# EAGLE board Osborne PSU PCB v7 (EAGLE 9.7.0)
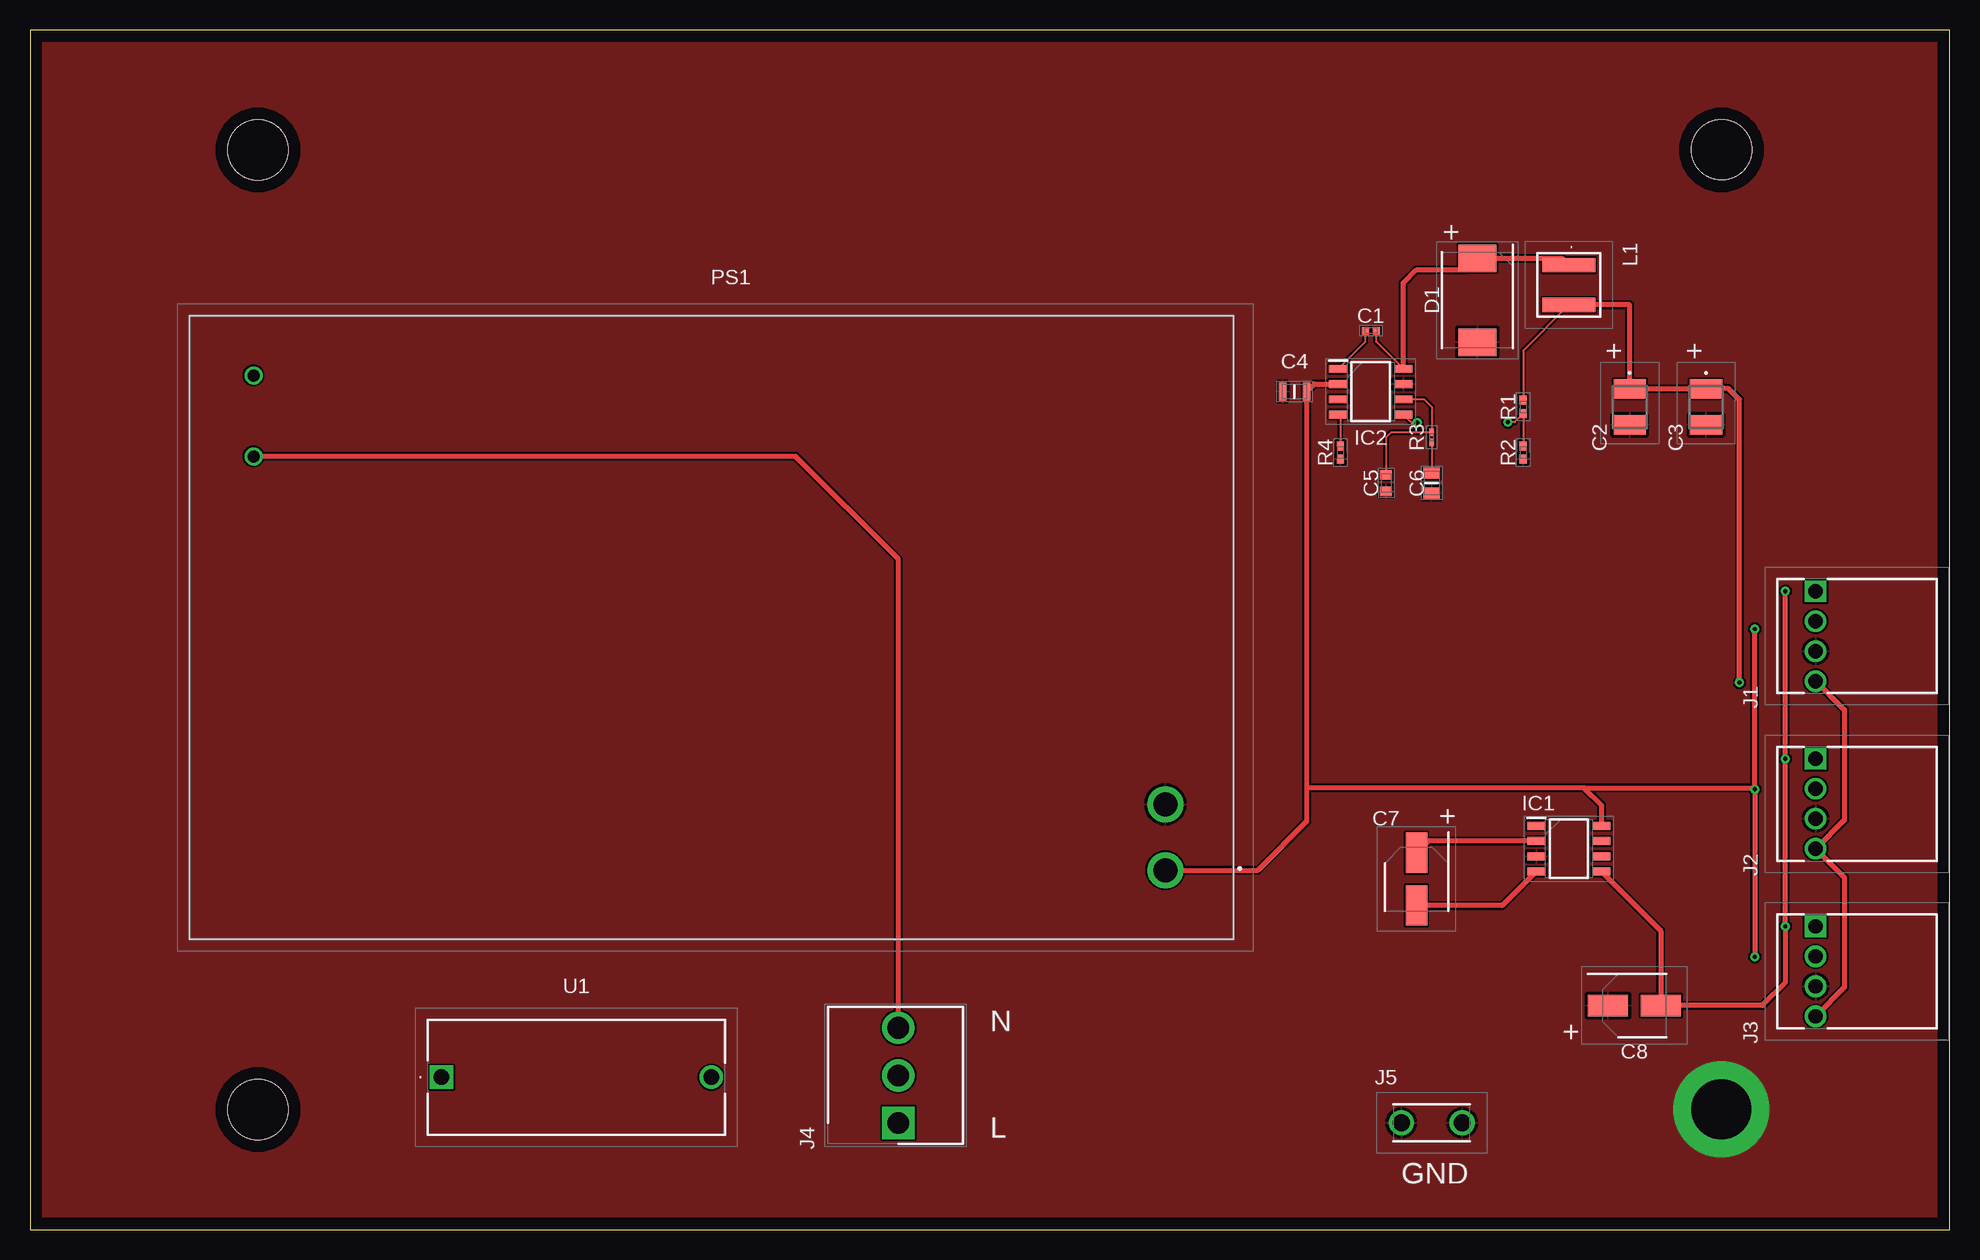
[diagram p0: board, top side]
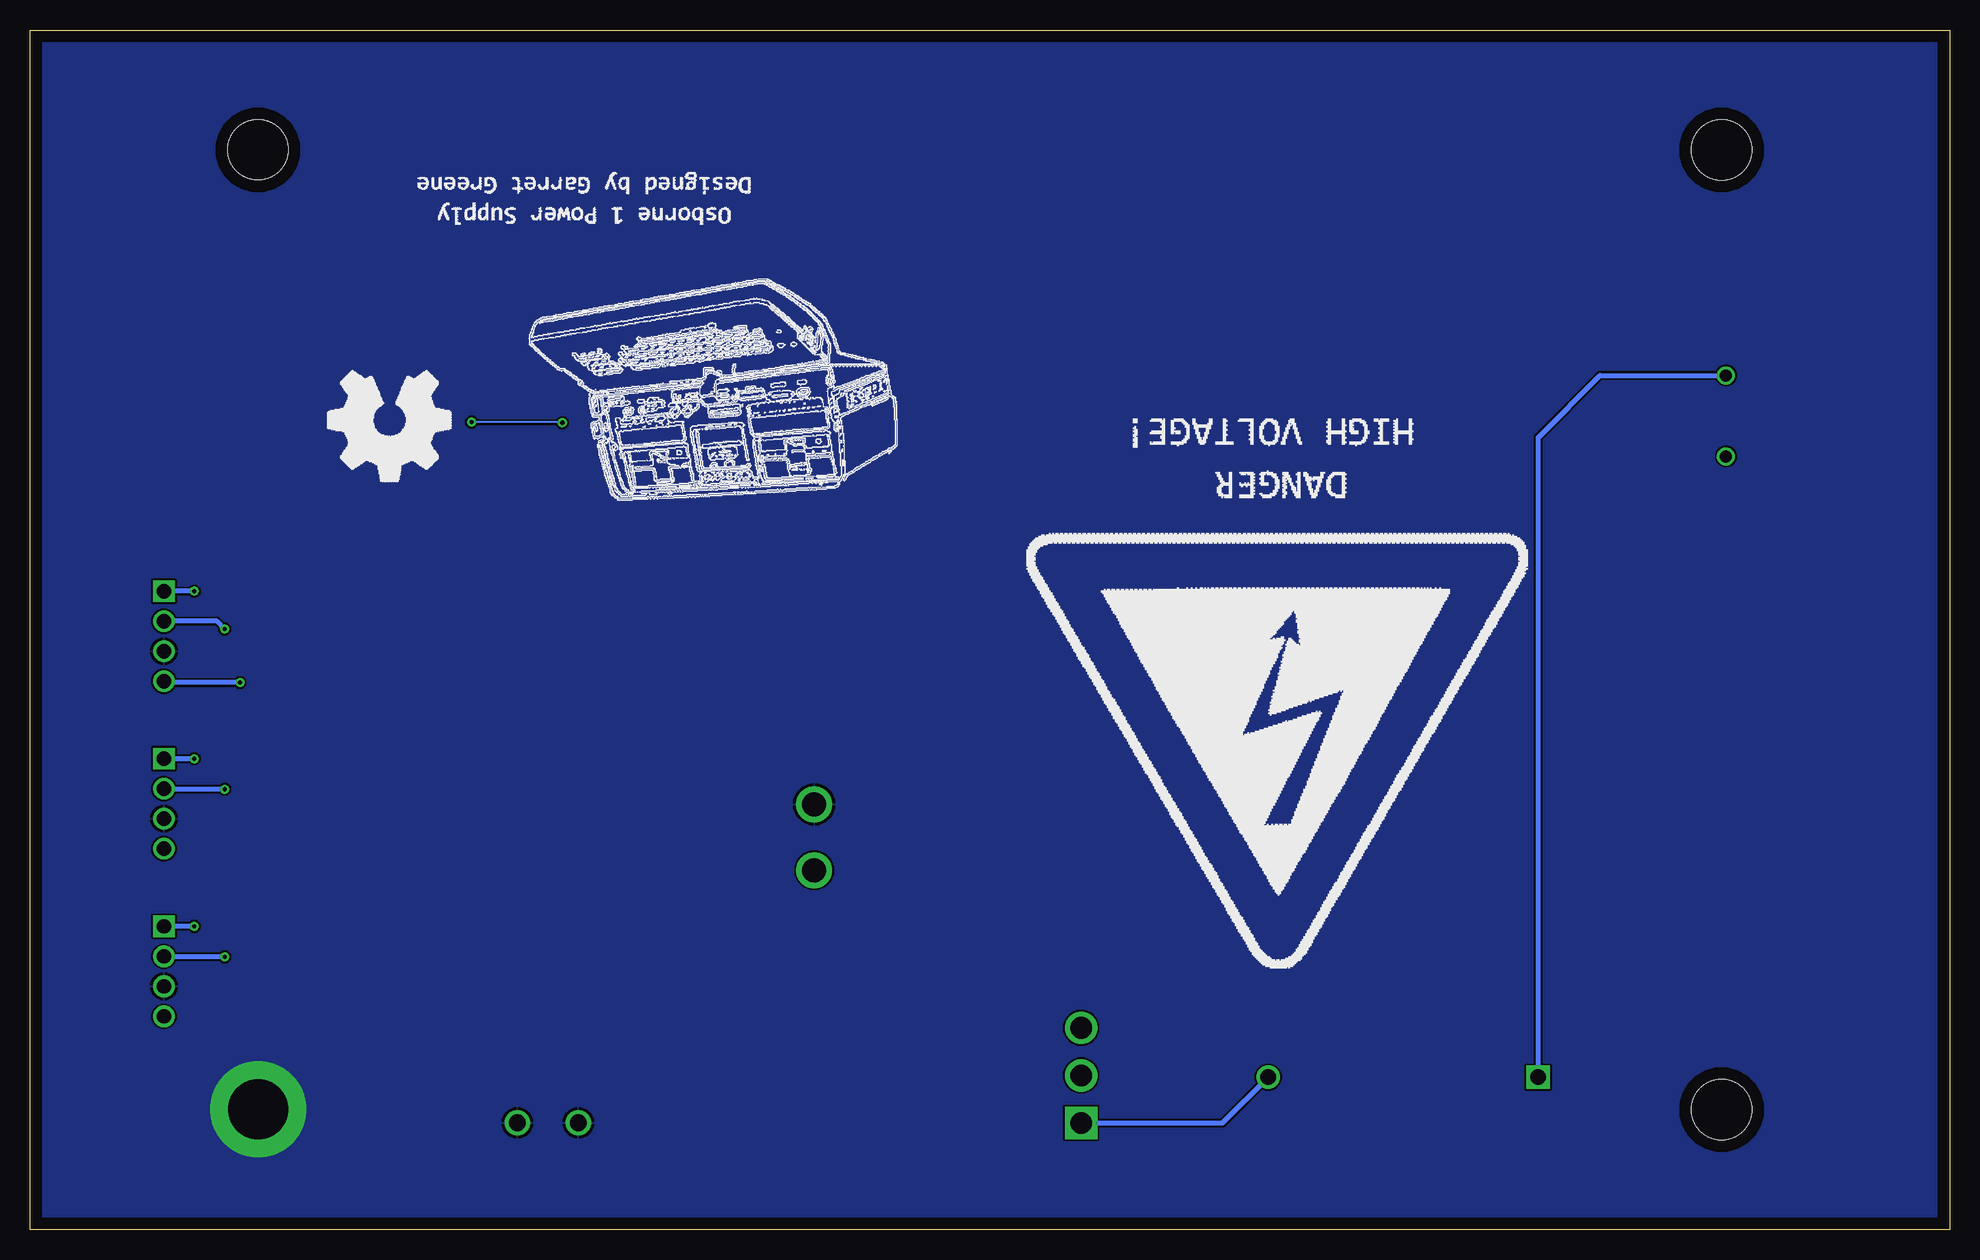
[diagram p1: board, bottom side, seen from below]

Size 160 x 100 mm. Coordinates in mm from the lower left corner, seen from the top.
Outline: 0,100 0,0 160,0 160,100 0,100
Copper layers (1*16): Top / Bottom
Stack-up Default Layer Stack: Top User Defined 0.035mm / Dielectric-1 User Defined 1.5mm / Bottom User Defined 0.035mm
Design rules: minimum copper width 6mil, minimum drill size 0.35mm, copper clearance wire_polygon to wire_polygon 6mil, copper clearance wire_polygon to pad_smd 6mil, copper clearance wire_polygon to via 6mil, copper clearance pad_smd to pad_smd 6mil, copper clearance pad_smd to via 6mil, copper clearance via to via 6mil, copper clearance smd to pad (same net) 6mil, copper clearance smd to via (same net) 6mil, copper clearance smd to smd (same net) 6mil, dimension clearance 40mil, via restrict clearance 0mil, restrict clearance 0mil, drill distance 6mil, keepout clearance 0mil
Holes 5 mm at 19,90 19,10 141,90.01

## Footprints (pad centres in the part's own frame; a part is rotated, then mirrored left to right if it is on the bottom)
CAPC1005X55N = smd 0.6 x 0.62: 1 -0.46,0; 2 0.46,0
POSCAP_B1_B1S_B1G_B15G_B2_B2S = smd 1.6 x 2.7: 1 -1.5,0; 2 1.5,0
CAPC2012X145N = smd 0.62 x 1.47: 1 -1,0; 2 1,0
CAPC1608X90N = smd 0.78 x 0.99: 1 -0.7,0; 2 0.7,0
CAPC2012X135N = smd 0.91 x 1.39: 1 -0.82,0; 2 0.82,0
CAPAE530X580N = smd 3.35 x 1.8: 1 -2.2,0; 2 2.2,0
DIOM8059X290N = smd 2.3 x 3.15: 1 -3.5,0; 2 3.5,0
SOIC127P600X175-8N = smd 1.525 x 0.65: 1 -2.712,1.905; 2 -2.712,0.635; 3 -2.712,-0.635; 4 -2.712,-1.905; 5 2.712,-1.905; 6 2.712,-0.635; 7 2.712,0.635; 8 2.712,1.905
SOIC127P600X170-8N = smd 1.525 x 0.65: 1 -2.712,1.905; 2 -2.712,0.635; 3 -2.712,-0.635; 4 -2.712,-1.905; 5 2.712,-1.905; 6 2.712,-0.635; 7 2.712,0.635; 8 2.712,1.905
22051042 = drill 1.2 pad 1.8 square: 1 0,0 | drill 1.2 pad 1.8: 2 2.5,0; 3 5,0; 4 7.5,0
SHDR3W160P0X396_1X3_1112X1062X = drill 1.8 pad 2.7 square: 1 0,0 | drill 1.8 pad 2.7: 2 -3.96,0; 3 -7.92,0
12171671 = drill 1.4 pad 2.1: 1 0,0; 2 5.08,0
XAL5030222MEC = smd 1.18 x 4.4: 1 -1.655,0; 2 1.655,0
IRM6048 = drill 2 pad 3: 1 5.7,46.25; 2 5.7,40.75 | drill 1 pad 1.5: 3 81.7,5; 4 81.7,11.75
RESC1005X40N = smd 0.75 x 0.6: 1 -0.55,0; 2 0.55,0
RESC0603X26N = smd 0.625 x 0.4: 1 -0.412,0; 2 0.412,0
696103201002 = drill 1.3 pad 1.95 square: 1 0,0 | drill 1.3 pad 1.95: 2 22.5,0

## Placement (x,y rotation side)
C1  GRM155R71A104KA01D  [CAPC1005X55N]  111.76,74.93 0 top
C2  10TPE47MAZB  [POSCAP_B1_B1S_B1G_B15G_B2_B2S]  133.35,68.58 270 top
C3  10TPE47MAZB  [POSCAP_B1_B1S_B1G_B15G_B2_B2S]  139.7,68.58 270 top
C4  C2012X5R1H475K125AB  [CAPC2012X145N]  105.41,69.85 0 top
C5  06031U6R8BAT2A  [CAPC1608X90N]  113.03,62.23 90 top
C6  CL21C222JBFNNNE  [CAPC2012X135N]  116.84,62.23 90 top
C7  875105359001  [CAPAE530X580N]  115.57,29.21 270 top
C8  875105359001  [CAPAE530X580N]  133.73,18.67 0 top
D1  CDBC540-G  [DIOM8059X290N]  120.65,77.47 270 top
IC1  ICL7662CBA+  [SOIC127P600X175-8N]  128.27,31.75 0 top
IC2  TPS54560BDDA  [SOIC127P600X170-8N]  111.76,69.85 0 top
J1  22-05-1042  [22051042]  148.84,53.21 270 top
J2  22-05-1042  [22051042]  148.84,39.24 270 top
J3  22-05-1042  [22051042]  148.84,25.27 270 top
J4  09-65-2038  [SHDR3W160P0X396_1X3_1112X1062X]  72.39,8.89 270 top
J5  1217167-1  [12171671]  114.3,8.89 0 top
L1  XAL5030-222MEC  [XAL5030222MEC]  128.27,78.74 270 top
PS1  IRM-60-12  [IRM6048]  100.33,76.2 180 top
R1  CRCW040260K4FKED  [RESC1005X40N]  124.46,68.58 270 top
R2  CRCW040211K5FKED  [RESC1005X40N]  124.46,64.77 90 top
R3  RC0201FR-0723K7L  [RESC0603X26N]  116.84,66.04 90 top
R4  CRCW040275K0FKED  [RESC1005X40N]  109.22,64.77 90 top
U1  696103201002  [696103201002]  34.29,12.7 0 top

## Library data of the parts
C1 = GRM155R71A104KA01D; DESCRIPTION: Ceramic SMT capacitor 100nF 10Vdc Murata 0402 GRM 100nF Ceramic Multilayer Capacitor, 10 V dc X7R Dielectric ??10%; HEIGHT: 0.55mm; MANUFACTURER_NAME: Murata Electronics; MANUFACTURER_PART_NUMBER: GRM155R71A104KA01D; MOUSER_PART_NUMBER: 81-GRM155R71A104KA1D; MOUSER_PRICE-STOCK: https://www.mouser.co.uk/ProductDetail/Murata-Electronics/GRM155R71A104KA01D?qs=8YPuuxuUzMIpJ%252BESZ%2Fj8CQ%3D%3D
C2 C3 = 10TPE47MAZB; DESCRIPTION: Capacitor Tantalum TPE series 10V 47uF Panasonic 47uF SMD Solid Polymer Tantalum Capacitor, 10 V dc +/-20%, POSCAP Series; HEIGHT: mm; MANUFACTURER_NAME: Panasonic; MANUFACTURER_PART_NUMBER: 10TPE47MAZB; MOUSER_PART_NUMBER: 667-10TPE47MAZB; MOUSER_PRICE-STOCK: https://www.mouser.co.uk/ProductDetail/Panasonic/10TPE47MAZB?qs=OE1iw1LrrPFA5jtx2CbXHA%3D%3D
C4 = C2012X5R1H475K125AB; DESCRIPTION: MULTILAYER CERAMIC CHIP CAPACITORS, 2012, Commercial grade, general (Up to 75V); HEIGHT: 1.45mm; MANUFACTURER_NAME: TDK; MANUFACTURER_PART_NUMBER: C2012X5R1H475K125AB; MOUSER_PART_NUMBER: 810-C2012X5R1H475K; MOUSER_PRICE-STOCK: https://www.mouser.co.uk/ProductDetail/TDK/C2012X5R1H475K125AB?qs=NRhsANhppD%252BC04rCIKmBpA%3D%3D
C5 = 06031U6R8BAT2A; DESCRIPTION: Multilayer Ceramic Capacitors MLCC - SMD/SMT 100V 6.8pF C0G 0603 0.1pF; HEIGHT: 0.9mm; MANUFACTURER_NAME: Kyocera AVX; MANUFACTURER_PART_NUMBER: 06031U6R8BAT2A; MOUSER_PART_NUMBER: 581-06031U6R8BAT2A; MOUSER_PRICE-STOCK: https://www.mouser.co.uk/ProductDetail/AVX/06031U6R8BAT2A?qs=ahudlVbFbas5u9ZWbUsx4w%3D%3D
C6 = CL21C222JBFNNNE; DESCRIPTION: Samsung Electro-Mechanics 0805 (2012M) 2.2nF MLCC 50V dc +/-5% SMD CL21C222JBFNNNE; HEIGHT: 1.35mm; MANUFACTURER_NAME: SAMSUNG; MANUFACTURER_PART_NUMBER: CL21C222JBFNNNE; MOUSER_PART_NUMBER: 187-CL21C222JBFNNNE; MOUSER_PRICE-STOCK: https://www.mouser.co.uk/ProductDetail/Samsung-Electro-Mechanics/CL21C222JBFNNNE?qs=349EhDEZ59r2o3fpAuNjEQ%3D%3D
C7 C8 = 875105359001; DESCRIPTION: WCAP-PSLP Aluminum Polymer Capacitor; HEIGHT: 5.8mm; MANUFACTURER_NAME: Wurth Elektronik; MANUFACTURER_PART_NUMBER: 875105359001; MOUSER_PART_NUMBER: 710-875105359001; MOUSER_PRICE-STOCK: https://www.mouser.co.uk/ProductDetail/Wurth-Elektronik/875105359001?qs=0KOYDY2FL299l4%2FtytGDVQ%3D%3D
D1 = CDBC540-G; DESCRIPTION: COMCHIP TECHNOLOGY CDBC540-G, SMT Schottky Diode, 40V 5A, 2-Pin DO-214AB (SMC); HEIGHT: 2.9mm; MANUFACTURER_NAME: Comchip Technology; MANUFACTURER_PART_NUMBER: CDBC540-G; MOUSER_PART_NUMBER: 750-CDBC540-G; MOUSER_PRICE-STOCK: https://www.mouser.co.uk/ProductDetail/Comchip-Technology/CDBC540-G?qs=tw%252BuQ%2FB6PO2ExpPYY64Vzw%3D%3D
IC1 = ICL7662CBA+; DESCRIPTION: ICL7662CBA+, Charge Pump Inverting, Step Up, -20 to -4.5V, 8-Pin, SOIC; HEIGHT: 1.75mm; MANUFACTURER_NAME: Analog Devices; MANUFACTURER_PART_NUMBER: ICL7662CBA+; MOUSER_PART_NUMBER: 700-ICL7662CBA; MOUSER_PRICE-STOCK: https://www.mouser.co.uk/ProductDetail/Analog-Devices-Maxim-Integrated/ICL7662CBA%2b?qs=0Y9aZN%252BMVCXxWqkDsFqq9Q%3D%3D
IC2 = TPS54560BDDA; DESCRIPTION: Switching Voltage Regulators A 595-TPS54560BDDAR; HEIGHT: 1.7mm; MANUFACTURER_NAME: Texas Instruments; MANUFACTURER_PART_NUMBER: TPS54560BDDA; MOUSER_PART_NUMBER: 595-TPS54560BDDA; MOUSER_PRICE-STOCK: https://www.mouser.co.uk/ProductDetail/Texas-Instruments/TPS54560BDDA?qs=gZXFycFWdAMqSdZZ7nACGQ%3D%3D
J1-J3 = 22-05-1042; DESCRIPTION: Headers & Wire Housings .098 HDR RA 4P 2.5mm ctrs; HEIGHT: 11.92mm; MANUFACTURER_NAME: Molex; MANUFACTURER_PART_NUMBER: 22-05-1042; MOUSER_PART_NUMBER: 538-22-05-1042; MOUSER_PRICE-STOCK: https://www.mouser.co.uk/ProductDetail/Molex/22-05-1042?qs=jsoPY5EnoNsaw4hmaEtAeg%3D%3D
J4 = 09-65-2038; DESCRIPTION: Socket; wire-board; male; KK 396,SPOX; 3.96mm; PIN:3; THT; HEIGHT: 14.25mm; MANUFACTURER_NAME: Molex; MANUFACTURER_PART_NUMBER: 09-65-2038; MOUSER_PART_NUMBER: 538-09-65-2038; MOUSER_PRICE-STOCK: https://www.mouser.co.uk/ProductDetail/Molex/09-65-2038?qs=A%252B%2FNCR0PvNU%2FSwDn3lpSlg%3D%3D
J5 = 1217167-1; DESCRIPTION: Contact Features: Mating Tab Width .25 INCH | Terminal Orientation Straight | Mating Tab Thickness .81 MM | Contact Mating Area Plating Material Thickness 3.81 MICM | PCB Terminal Type Tab | Terminal Size 6.35 | Contact Underplating Material Thickness 2.54 MICM | Contact Mating Area Plating Material Thickness 150 MICIN | Mating Tab Thickness .032 INCH | Mating Tab Width 6.35 MM | PCB Contact Termination Area Plating Material Thickness 150 MICIN | PCB Contact Termination Area Plating Material Thickness 3.81; HEIGHT: 16mm; MANUFACTURER_NAME: TE Connectivity; MANUFACTURER_PART_NUMBER: 1217167-1; MOUSER_PART_NUMBER: 571-1217167-1; MOUSER_PRICE-STOCK: https://www.mouser.co.uk/ProductDetail/TE-Connectivity-AMP/1217167-1?qs=6V028PXUNOIl5a71CGHxww%3D%3D
L1 = XAL5030-222MEC; DESCRIPTION: INDUCTOR, 2.2UH, 9.2A, 20%, PWR, 38MHZ; HEIGHT: 3.1mm; MANUFACTURER_NAME: COILCRAFT; MANUFACTURER_PART_NUMBER: XAL5030-222MEC; MOUSER_PART_NUMBER: 994-XAL5030-222MEC; MOUSER_PRICE-STOCK: https://www.mouser.co.uk/ProductDetail/Coilcraft/XAL5030-222MEC?qs=zCSbvcPd3pamMZlPWCpd5A%3D%3D
PS1 = IRM-60-12; DESCRIPTION: Mean Well 60W Encapsulated Switch Mode Power Supply, 0 5A, 12V dc; HEIGHT: 29mm; MANUFACTURER_NAME: Mean Well; MANUFACTURER_PART_NUMBER: IRM-60-12; MOUSER_PART_NUMBER: 709-IRM60-12; MOUSER_PRICE-STOCK: https://www.mouser.co.uk/ProductDetail/MEAN-WELL/IRM-60-12?qs=yID0DEbBT%252BlHwZTyc2lfhA%3D%3D
R1 = CRCW040260K4FKED; DESCRIPTION: Vishay CRCW Series Thick Film Surface Mount Resistor 0402 Case 60.4k +/-1% 0.063W +/-100ppm/C; HEIGHT: 0.4mm; MANUFACTURER_NAME: Vishay; MANUFACTURER_PART_NUMBER: CRCW040260K4FKED; MOUSER_PART_NUMBER: 71-CRCW0402-60.4K-E3; MOUSER_PRICE-STOCK: https://www.mouser.co.uk/ProductDetail/Vishay-Dale/CRCW040260K4FKED?qs=DKbL89i6OEqEiKuCH716cg%3D%3D
R2 = CRCW040211K5FKED; DESCRIPTION: Vishay CRCW Series Thick Film Surface Mount Resistor 402 Case 11.5k +/-1% 0.063W +/-100ppm/C; HEIGHT: 0.4mm; MANUFACTURER_NAME: Vishay; MANUFACTURER_PART_NUMBER: CRCW040211K5FKED; MOUSER_PART_NUMBER: 71-CRCW0402-11.5K-E3; MOUSER_PRICE-STOCK: https://www.mouser.co.uk/ProductDetail/Vishay-Dale/CRCW040211K5FKED?qs=rlE3Te1NifwrZlkreCr9ew%3D%3D
R3 = RC0201FR-0723K7L; DESCRIPTION: Res Thick Film 0201 23.7K Ohm 1% 0.05W(1/20W) +/-200ppm/C Epoxy Pad SMD T/R; HEIGHT: 0.26mm; MANUFACTURER_NAME: YAGEO; MANUFACTURER_PART_NUMBER: RC0201FR-0723K7L; MOUSER_PART_NUMBER: 603-RC0201FR-0723K7L; MOUSER_PRICE-STOCK: https://www.mouser.co.uk/ProductDetail/YAGEO/RC0201FR-0723K7L?qs=Q4gDqC5t5%2FAQco3wz1Gmbw%3D%3D
R4 = CRCW040275K0FKED; DESCRIPTION: Vishay CRCW Series Thick Film Surface Mount Resistor 0402 Case 75k +/-1% 0.063W +/-100ppm/C; HEIGHT: 0.4mm; MANUFACTURER_NAME: Vishay; MANUFACTURER_PART_NUMBER: CRCW040275K0FKED; MOUSER_PART_NUMBER: 71-CRCW0402-75K-E3; MOUSER_PRICE-STOCK: https://www.mouser.co.uk/ProductDetail/Vishay-Dale/CRCW040275K0FKED?qs=Yor07UEv01XD90tYACrZAA%3D%3D
U1 = 696103201002; DESCRIPTION: WURTH ELEKTRONIK - 696103201002 - Fuse Clip, Cartridge, 1 Pos, 5mm x 20mm, 250V, 20A, Pin; HEIGHT: 12.7mm; MANUFACTURER_NAME: Wurth Elektronik; MANUFACTURER_PART_NUMBER: 696103201002; MOUSER_PART_NUMBER: 710-696103201002; MOUSER_PRICE-STOCK: https://www.mouser.co.uk/ProductDetail/Wurth-Elektronik/696103201002?qs=%252BEew9%252B0nqrD%2Fzw00wamlEg%3D%3D

## Nets
GND: C2.2 C3.2 C4.1 C5.1 C6.1 C8.1 D1.2 IC1.3 IC2.7 J1.3 J2.3 J3.3 J5.1 J5.2 PS1.2 R2.1 R4.1
N$1: C4.2 IC1.8 IC2.2 J1.2 J2.2 J3.2 PS1.1
N$2: C2.1 C3.1 J1.4 J2.4 J3.4 L1.2 R1.1
N$3: C5.2 IC2.6 R3.2
N$4: C6.2 R3.1
N$5: C7.2 IC1.4
N$6: IC2.4 R4.2
N$7: C1.1 IC2.1
N$8: C1.2 D1.1 IC2.8 L1.1
N$9: IC2.5 R1.2 R2.2
N$10: C7.1 IC1.2
N$11: C8.2 IC1.5 J1.1 J2.1 J3.1
N$12: J4.1 U1.2
N$13: PS1.3 U1.1
N$14: J4.3 PS1.4

## Tracks (layer width: path | path; a pad name or v marks a point on that pad's centre or on a via)
GND  (via drill 5 pad 8)
  other vias: 140.97,10.01
  pour Top: 160,0 0,0 0,100 160,100
  pour Bottom: 160,0 0,0 0,100 160,100
N$1  (via drill 0.35)
  Top 0.406: v143.76,36.7 v143.76,22.73 | v143.76,36.7 v143.76,50.07 | IC2.2 107.05,70.48 C4.2 106.41,36.83 | PS1.1 102.34,29.95 106.41,34.02 106.41,36.83 | 129.54,36.83 106.41,36.83 | 129.54,36.83 130.98,35.39 IC1.8 | 129.54,36.83 143.64,36.83 v143.76,36.7
  Bottom 0.152: 148.84,36.7 J2.2
  Bottom 0.406: v143.76,36.7 148.84,36.7 | v143.76,22.73 148.8,22.73 J3.2 | v143.76,50.07 144.41,50.71 J1.2
N$2  (via drill 0.35)
  Top 0.152: L1.2 124.46,73.28 R1.1
  Top 0.406: J1.4 151.24,43.31 151.24,34.14 J2.4 151.24,29.34 151.24,20.17 J3.4 | L1.2 133.35,77.08 C2.1 C3.1 139.72,70.1 141.58,70.1 142.49,69.19 v142.49,45.59
  Bottom 0.406: v142.49,45.59 148.72,45.59 J1.4
N$3
  Top 0.152: IC2.6 116.2,69.22 116.84,68.58 R3.2 113.44,66.45 113.03,66.04 C5.2
N$4
  Top 0.152: R3.1 C6.2
N$5
  Top 0.406: IC1.4 122.72,27.01 C7.2
N$6
  Top 0.152: IC2.4 109.22,67.77 R4.2
N$7
  Top 0.152: IC2.1 111.3,74.01 C1.1
N$8
  Top 0.152: IC2.8 112.22,74.01 C1.2 | 119.69,80.01 D1.1
  Top 0.406: IC2.8 114.47,78.91 115.57,80.01 119.69,80.01 | D1.1 127.69,80.97 L1.1
N$9  (via drill 0.35)
  Top 0.152: R2.2 R1.2 123.74,67.31 v123.19,67.31 | v115.62,67.26 115.16,67.26 IC2.5
  Bottom 0.152: v115.62,67.26 115.67,67.31 v123.19,67.31
N$10
  Top 0.406: IC1.2 116.55,32.38 C7.1
N$11  (via drill 0.35)
  Top 0.406: v146.3,53.21 v146.3,39.24 v146.3,25.27 146.3,20.57 144.4,18.67 C8.2 | C8.2 134.61,18.67 | IC1.5 135.93,24.9 C8.2
  Bottom 0.406: v146.3,53.21 J1.1 | v146.3,39.24 J2.1 | v146.3,25.27 J3.1
N$12
  Bottom 0.406: J4.1 60.6,8.89 U1.2
N$13
  Bottom 0.406: U1.1 34.29,66.04 29.13,71.2 PS1.3
N$14
  Top 0.406: J4.3 72.39,55.88 63.82,64.45 PS1.4

## Text on the board
NamesTop: + | + | + | + | N | + | L | GND